# EAGLE board CAN-servo-control (EAGLE 9.6.2)
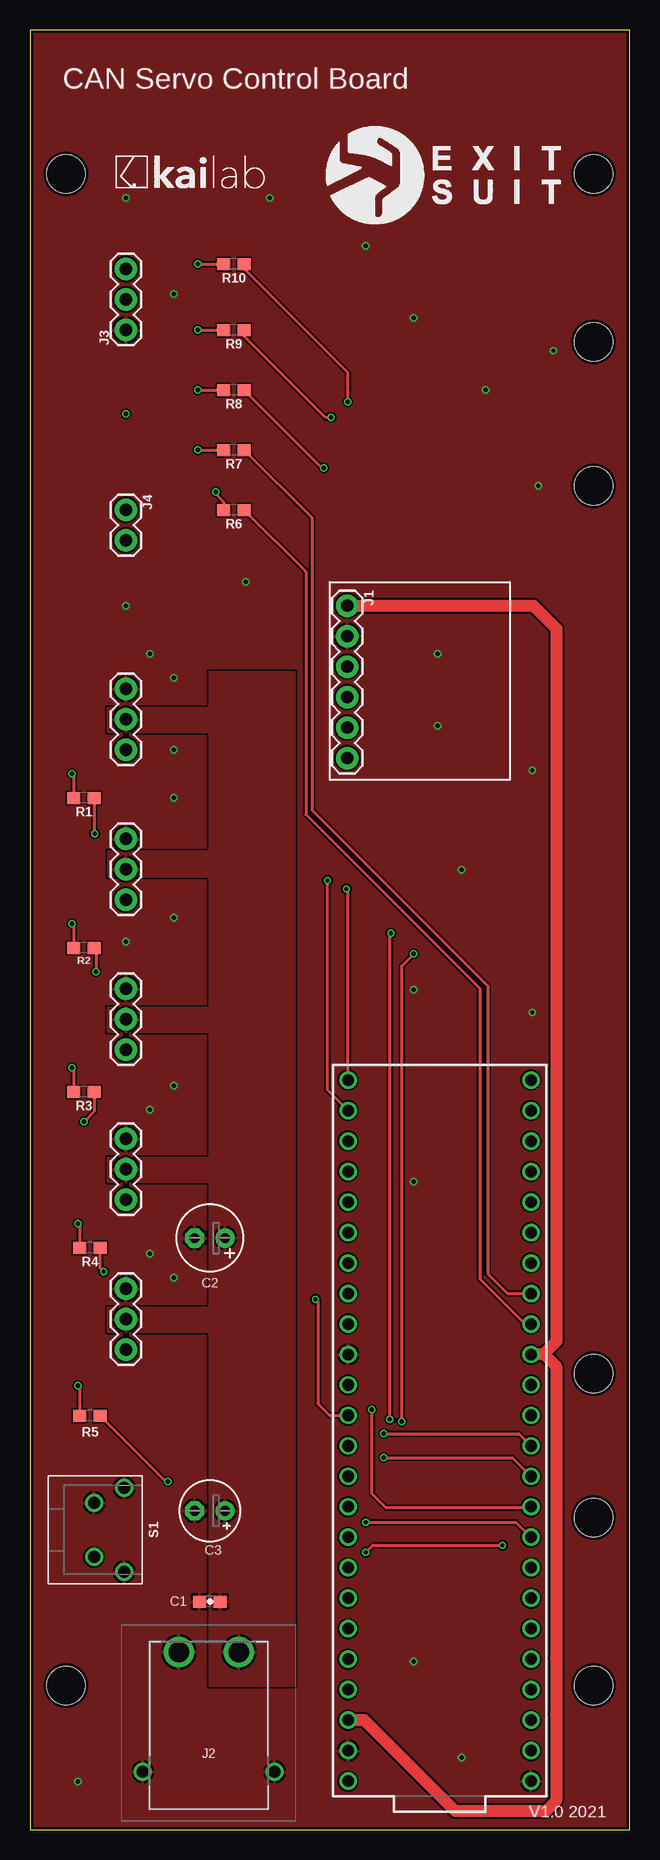
[diagram p0: board, top side]
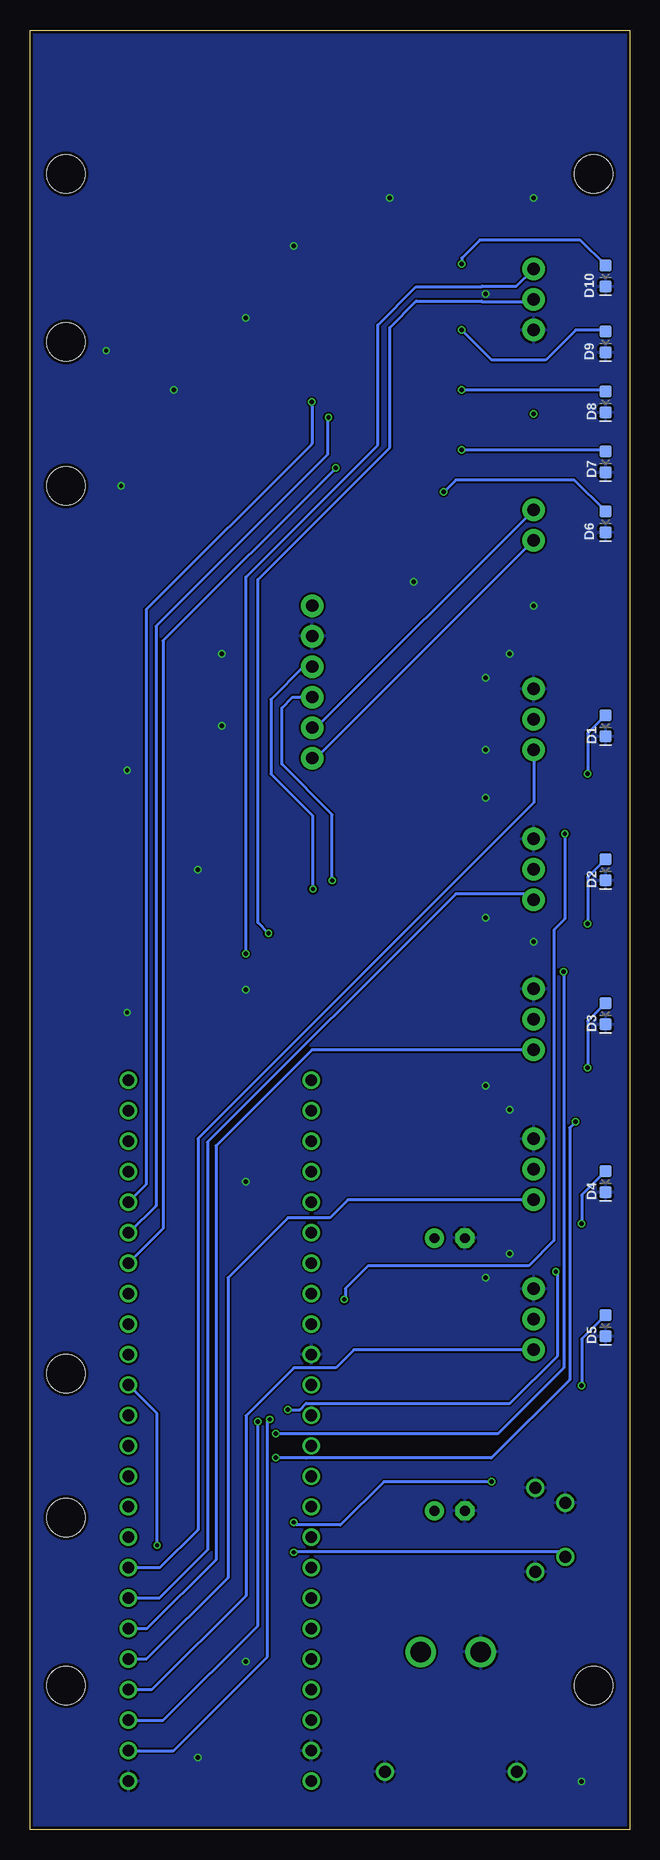
[diagram p1: board, bottom side, seen from below]

Size 50 x 150 mm. Coordinates in mm from the lower left corner, seen from the top.
Outline: 0,0 50,0 50,150 0,150 0,0
Copper layers (1*16): Top 0.018mm / dielectric 1.55mm / Bottom 0.018mm
Design rules "eC_2Layer_PClass6_BaseCopperO18_eCDefault": minimum track width 0.15mm, minimum drill 0.35mm, track to track 0.15mm, track to pad 0.15mm, pad to pad 0.15mm, via to via 0.15mm, smd to smd 0mil, copper to edge 0.25mm, drill to drill 0.35mm, minimum pad ring 0.175mm, minimum via ring 0.125mm, stop-mask expansion 0mil, vias tented up to drill 0.45mm, thermal gap 0.2mm
Holes 3.2 mm at 3,138 47,138 47,12 3,12 47,26 47,38 47,124 47,112

## Footprints (pad centres in the part's own frame; a part is rotated, then mirrored left to right if it is on the bottom)
SPARKFUN_0603-CAP = smd 1.1 x 1: 1 -0.85,0; 2 0.85,0
E2,5-6 = drill 0.813 pad 1.6: + -1.27,0 | drill 0.813 pad 1.6 octagon: - 1.27,0
E2,5-5 = drill 0.813 pad 1.6: + -1.27,0 | drill 0.813 pad 1.6 octagon: - 1.27,0
SPARKFUN-LED_LED-0603 = smd 1 x 1: A -0.877,0; C 0.877,0
1X06 = drill 1.016 pad 1.88: 1 0,0; 2 2.54,0; 3 5.08,0; 4 7.62,0; 5 10.16,0; 6 12.7,0
XT30PWM = drill 1.7 pad 2.55: 1 -2.5,-5.912; 2 2.5,-5.912 | drill 1 pad 1.5: 3 5.5,4.088; 4 -5.5,4.088
1X03 = drill 1.016 pad 1.88: 1 0,0; 2 2.54,0; 3 5.08,0
1X02 = drill 1.016 pad 1.88: 1 0,0; 2 2.54,0
SPARKFUN-RESISTORS_0603 = smd 1.1 x 1: 1 -0.85,0; 2 0.85,0
431256038716 = drill 1: 1 -3.5,1.25; 2 -2.25,-1.25; 3 2.25,-1.25; 4 3.5,1.25
TEENSY_3.6_DIL = drill 0.965: 0 -7.62,25.4; 1 -7.62,22.86; 2 -7.62,20.32; 3 -7.62,17.78; 3.3V 7.62,22.86; 3.3V3 -7.62,-7.62; 4 -7.62,15.24; 5 -7.62,12.7; 6 -7.62,10.16; 7 -7.62,7.62; 8 -7.62,5.08; 9 -7.62,2.54; 10 -7.62,0; 11 -7.62,-2.54; 12 -7.62,-5.08; 13 7.62,-5.08; 14/A0 7.62,-2.54; 15/A1 7.62,0; 16/A2 7.62,2.54; 17/A3 7.62,5.08; 18/A4 7.62,7.62; 19/A5 7.62,10.16; 20/A6 7.62,12.7; 21/A7 7.62,15.24; 22/A8 7.62,17.78; 23/A9 7.62,20.32; 24 -7.62,-10.16; 25 -7.62,-12.7; 26 -7.62,-15.24; 27 -7.62,-17.78; 28 -7.62,-20.32; 29 -7.62,-22.86; 30 -7.62,-25.4; 31/A12 -7.62,-27.94; 32/A13 -7.62,-30.48; 33/A14 7.62,-30.48; 34/A15 7.62,-27.94; 35/A16 7.62,-25.4; 36/A17 7.62,-22.86; 37/A18 7.62,-20.32; 38/A19 7.62,-17.78; 39/A20 7.62,-15.24; A21 7.62,-12.7; A22 7.62,-10.16; AGND 7.62,25.4; GND -7.62,27.94; GND1 7.62,-7.62; VIN 7.62,27.94

## Placement (x,y rotation side)
C1  0.1uF  [SPARKFUN_0603-CAP]  15,19 180 top
C2  470uF  [E2,5-6]  15,49.3 180 top
C3  100uF  [E2,5-5]  15,26.57 180 top
D1  [SPARKFUN-LED_LED-0603]  2,92 270 bottom
D2  [SPARKFUN-LED_LED-0603]  2,80 270 bottom
D3  [SPARKFUN-LED_LED-0603]  2,68 270 bottom
D4  [SPARKFUN-LED_LED-0603]  2,54 270 bottom
D5  [SPARKFUN-LED_LED-0603]  2,42 270 bottom
D6  [SPARKFUN-LED_LED-0603]  2,109 270 bottom
D7  [SPARKFUN-LED_LED-0603]  2,114 270 bottom
D8  [SPARKFUN-LED_LED-0603]  2,119 270 bottom
D9  [SPARKFUN-LED_LED-0603]  2,124 270 bottom
D10  [SPARKFUN-LED_LED-0603]  2,129.5 270 bottom
J1  [1X06]  26.46,102.01 270 top
J2  XT30PW-M  [XT30PWM]  14.91,8.89 180 top
J3  455-1750-1-ND  [1X03]  8,125 90 top
J4  [1X02]  8,110 270 top
J5  SERVO 5  [1X03]  8,90 90 top
J6  SERVO 4  [1X03]  8,77.5 90 top
J7  SERVO 3  [1X03]  8,65 90 top
J8  SERVO 2  [1X03]  8,52.5 90 top
J9  SERVO 1  [1X03]  8,40 90 top
R1  150  [SPARKFUN-RESISTORS_0603]  4.5,86 180 top
R2  150  [SPARKFUN-RESISTORS_0603]  4.5,73.5 180 top
R3  150  [SPARKFUN-RESISTORS_0603]  4.5,61.5 180 top
R4  150  [SPARKFUN-RESISTORS_0603]  5,48.5 180 top
R5  150  [SPARKFUN-RESISTORS_0603]  5,34.5 180 top
R6  150  [SPARKFUN-RESISTORS_0603]  17,110 180 top
R7  150  [SPARKFUN-RESISTORS_0603]  17,115 180 top
R8  150  [SPARKFUN-RESISTORS_0603]  17,120 180 top
R9  150  [SPARKFUN-RESISTORS_0603]  17,125 180 top
R10  150  [SPARKFUN-RESISTORS_0603]  17,130.5 180 top
S1  RESET  [431256038716]  6.6,24.97 270 top
U$1  TEENSY_3.6_DIL  [TEENSY_3.6_DIL]  34.16,31.98 180 top

## Library data of the parts
C1 = Lighting_Controller_1.1
C2 C3 = rcl; SPICEPREFIX: C
D1-D10 = ControlBoard_V2.1
J1 = SparkFun-Connectors; PROD_ID: CONN-08437
J2 = XT30PW-M; DESCRIPTION: 30A Low Temperature Rise Fire Retardant Plug; HEIGHT: 5mm; MANUFACTURER_NAME: Amass; MANUFACTURER_PART_NUMBER: XT30PW-M
J3 J5-J9 = SparkFun-Connectors; PROD_ID: XXX-00000
J4 = SparkFun-Connectors
R1-R10 = Lighting_Controller_1.1; PROD_ID: RES-11028
S1 = Wurth_Elektronik_Electromechanic_Switch_rev15e
U$1 = Teensy_3_and_LC_Series_Boards_v1.4

## Nets
3V3: J1.1 U$1.3.3V U$1.3.3V3
7V: C1.1 C2.+ C3.+ J2.1 J5.2 J6.2 J7.2 J8.2 J9.2
APPON: R6.1 U$1.24
CAN_RX: R9.1 U$1.27
CAN_TX: R10.1 U$1.28
CANRX: J1.4 U$1.34/A15
CANTX: J1.3 U$1.33/A14
CH: J1.5 J4.1
CL: J1.6 J4.2
DT1: J5.1 U$1.6
DT2: J6.1 U$1.5
DT3: J7.1 U$1.4
DT4: J8.1 U$1.3
DT5: J9.1 U$1.2
GND: C1.2 C2.- C3.- D1.C D2.C D3.C D4.C D5.C D6.C D7.C D8.C D9.C D10.C J1.2 J2.2 J2.3 J2.4 J3.1 J5.3 J6.3 J7.3 J8.3 J9.3 S1.1 S1.2 S1.4 U$1.AGND U$1.GND U$1.GND1
MSG_R: R7.1 U$1.25
MSG_S: R8.1 U$1.26
N$1: S1.3 U$1.12
N$2: D1.A R1.2
N$3: D2.A R2.2
N$4: D3.A R3.2
N$5: D4.A R4.2
N$6: D5.A R5.2
N$7: D6.A R6.2
N$13: D7.A R7.2
N$14: D8.A R8.2
N$15: D9.A R9.2
N$16: D10.A R10.2
RX: J3.2 U$1.0
SERVO1: R1.1 U$1.14/A0
SERVO2: R2.1 U$1.10
SERVO3: R3.1 U$1.9
SERVO4: R4.1 U$1.8
SERVO5: R5.1 U$1.7
TX: J3.3 U$1.1
VIN: U$1.VIN

## Tracks (layer width: path | path; a pad name or v marks a point on that pad's centre or on a via)
3V3
  Top 1.016: U$1.3.3V 27.88,9.12 35.48,1.52 43,1.52 43.88,2.4 43.88,9.6 43.88,14.3 43.88,38.62 42.9,39.6 U$1.3.3V3 42.8,39.6 43.9,40.7 43.9,100.1 41.99,102.01 J1.1
7V
  pour Top: 15,12 15,96.5 22,96.5 22,12
  pour Top: 15.5,81.5 6.5,81.5 6.5,79.5 15.5,79.5
  pour Top: 6.5,68.5 16,68.5 16,66.5 6.5,66.5
  pour Top: 6.5,56 15.5,56 15.5,54 6.5,54
  pour Top: 6.5,43.5 16,43.5 16,41.5 6.5,41.5
  pour Top: 6.5,93.5 16,93.5 16,91.5 6.5,91.5
APPON
  Top 0.254: R6.1 23,104.85 23,84.6 37.5,70.1 37.5,45.9 41.26,42.14 U$1.24
CAN_RX  (via drill 0.35)
  Top 0.254: R9.1 17.85,124.5 24.65,117.7 v25.1,117.7
  Bottom 0.254: v25.1,117.7 25.2,117.6 25.2,114.6 39.5,100.3 39.5,52 41.74,49.76 U$1.27
CAN_TX  (via drill 0.35)
  Top 0.254: v26.5,119 26.5,121.45 17.85,130.1 R10.1
  Bottom 0.254: v26.5,119 26.5,115.5 40.3,101.7 40.3,53.78 U$1.28
CANRX  (via drill 0.35)
  Top 0.254: U$1.34/A15 24.8,61.66 v24.8,79.1
  Bottom 0.254: v24.8,79.1 24.8,84.6 29,88.8 29,93.5 28.11,94.39 J1.4
CANTX  (via drill 0.35)
  Top 0.254: U$1.33/A14 26.54,78.46 26.5,78.5 v26.4,78.4
  Bottom 0.254: v26.4,78.4 26.4,84.5 29.9,88 29.9,94.2 27.17,96.93 J1.3
CH
  Bottom 0.254: J4.1 26.15,91.85 J1.5
CL
  Bottom 0.254: J4.2 26.15,89.31 J1.6
DT1
  Bottom 0.254: U$1.6 39.18,21.82 36,25 36,57.6 8,85.6 J5.1
DT2
  Bottom 0.254: J6.1 8.5,78 14.5,78 35.2,57.3 35.2,23.3 39.22,19.28 U$1.5
DT3
  Bottom 0.254: J7.1 26.5,65 34.5,57 34.5,22.5 40.26,16.74 U$1.4
DT4
  Bottom 0.254: J8.1 23.5,52.5 25,51 28.5,51 33.5,46 33.5,21 40.3,14.2 U$1.3
DT5
  Bottom 0.254: U$1.2 39.84,11.66 32,19.5 32,34.5 28,38.5 24.5,38.5 23,40 J9.1
GND  (via drill 0.35)
  other vias: 4,4 32,14 36,6 32,54 12,46 10,48 12,62 10,60 8,74 12,76 12,86 12,90 12,96 10,98 8,102 18,104 12,128 8,136 20,136 28,132 32,126 38,120 43.64,123.28 42.4,112 34,98 34,92 41.9,88.3 36,80 32,70 41.9,68.1
  pour Bottom: 0,0 50,0 50,150 0,150
  pour Top (rank 3): 0,0 0,150 50,150 50,0
MSG_R
  Top 0.254: R7.1 23.5,109.35 23.5,85 38.2,70.3 38.2,46.3 39.82,44.68 U$1.25
MSG_S  (via drill 0.35)
  Top 0.254: R8.1 24.35,113.5 v24.5,113.5
  Bottom 0.254: v24.5,113.5 38.9,99.1 38.9,50.1 U$1.26
N$1  (via drill 0.35)
  Top 0.254: v28,23.1 28.6,23.7 v39.4,23.7
  Bottom 0.254: S1.3 5.77,23.14 27.96,23.14 v28,23.1 | v39.4,23.7 39.4,34.68 U$1.12
N$2  (via drill 0.35)
  Top 0.254: v3.5,88 3.65,87.85 R1.2
  Bottom 0.254: D1.A 3.5,91.38 v3.5,88
N$3  (via drill 0.35)
  Top 0.254: v3.5,75.5 3.65,75.35 R2.2
  Bottom 0.254: D2.A 3.5,79.38 v3.5,75.5
N$4  (via drill 0.35)
  Top 0.254: v3.5,63.5 3.65,63.35 R3.2
  Bottom 0.254: D3.A 3.5,67.38 v3.5,63.5
N$5  (via drill 0.35)
  Top 0.254: v4,50.5 4.15,50.35 R4.2
  Bottom 0.254: D4.A 4,52.88 v4,50.5
N$6  (via drill 0.35)
  Top 0.254: v4,37 4.15,36.85 R5.2
  Bottom 0.254: D5.A 4,40.88 v4,37
N$7  (via drill 0.35)
  Top 0.254: v15.5,111.5 15.5,111.3 16.15,110.65 R6.2
  Bottom 0.254: D6.A 4.62,112.5 14.5,112.5 v15.5,111.5
N$13  (via drill 0.35)
  Top 0.254: v14,115 R7.2
  Bottom 0.254: D7.A 2.12,115 v14,115
N$14  (via drill 0.35)
  Top 0.254: v14,120 R8.2
  Bottom 0.254: D8.A 2.12,120 v14,120
N$15  (via drill 0.35)
  Top 0.254: v14,125 R9.2
  Bottom 0.254: D9.A 2.12,125 4.5,125 7,122.5 11.5,122.5 v14,125
N$16  (via drill 0.35)
  Top 0.254: v14,130.5 R10.2
  Bottom 0.254: D10.A 4.12,132.5 12.5,132.5 14,131 v14,130.5
N$24  (via drill 0.35)
  other vias: 8,118
RX  (via drill 0.35)
  Top 0.254: v30,34.2 30,74.4 30.2,74.6 v30.1,74.7
  Bottom 0.254: U$1.0 38.02,6.58 30.2,14.4 30.2,34 v30,34.2 | v30.1,74.7 31,75.6 31,104.2 20,115.2 20,125.2 17.8,127.4 12.33,127.4 12.27,127.34 8.2,127.34 J3.2
SERVO1  (via drill 0.35)
  Top 0.254: R1.1 5.35,83.05 v5.4,83 | v23.8,44.2 24,44 24,35.5 24.98,34.52 U$1.14/A0
  Bottom 0.254: v5.4,83 5.4,75.9 6.3,75 6.3,49.1 8.4,47 21.8,47 23.7,45.1 23.7,44.2 v23.8,44.2
SERVO2  (via drill 0.35)
  Top 0.254: R2.1 5.5,73.35 v5.5,71.5 | v29.5,33 40.76,33 U$1.10
  Bottom 0.254: v5.5,71.5 5.5,38.5 11,33 v29.5,33
SERVO3  (via drill 0.35)
  Top 0.254: R3.1 5.35,59.85 v4.5,59 | v29.5,31 40.22,31 U$1.9
  Bottom 0.254: v4.5,59 5,58.5 5,37.5 11.54,30.96 26.96,30.96 27,31 v29.5,31
SERVO4  (via drill 0.35)
  Top 0.254: U$1.8 41.68,26.8 29.7,26.8 28.5,28 v28.5,35 | v6.16,46.5 5.85,46.81 R4.1
  Bottom 0.254: v28.5,35 27.5,35 26.96,35.54 9.96,35.54 6,39.5 6,46.5 v6.16,46.5
SERVO5  (via drill 0.35)
  Top 0.254: R5.1 11.35,29 v11.5,29 | v28,25.6 40.54,25.6 U$1.7
  Bottom 0.254: v11.5,29 20.5,29 24.12,25.38 28,25.38 v28,25.6
TX  (via drill 0.35)
  Top 0.254: v31,34 31,72 v32,73
  Bottom 0.254: U$1.1 38.88,9.12 31,17 v31,34 | v32,73 32,104.4 21,115.4 21,125.4 17.8,128.6 12.33,128.6 12.27,128.66 9.42,128.66 J3.3

## Text on the board
tPlace: CAN Servo Control Board | V1.0 2021 | /Users/kailab/Google Drive/Kai Lab/04 - ENGINEERING/07 - ELECTRONICS DESIGN/03 - EAGLE BMP/logo_&_type.bmp